# Altium PCB bootleg-alps.PcbDoc (part 2 of 3)
Units mm, origin at the board's own origin, x right, y up, seen from the top; angles counter-clockwise.
Board outline 284.8 x 94.3 mm, 2 copper layers (Component Side, Bottom Layer), stack 1.571 mm thick; 188 components, 146 nets, 677 pads, 266 vias.
Unrouted connection lines stored in the file: 68.
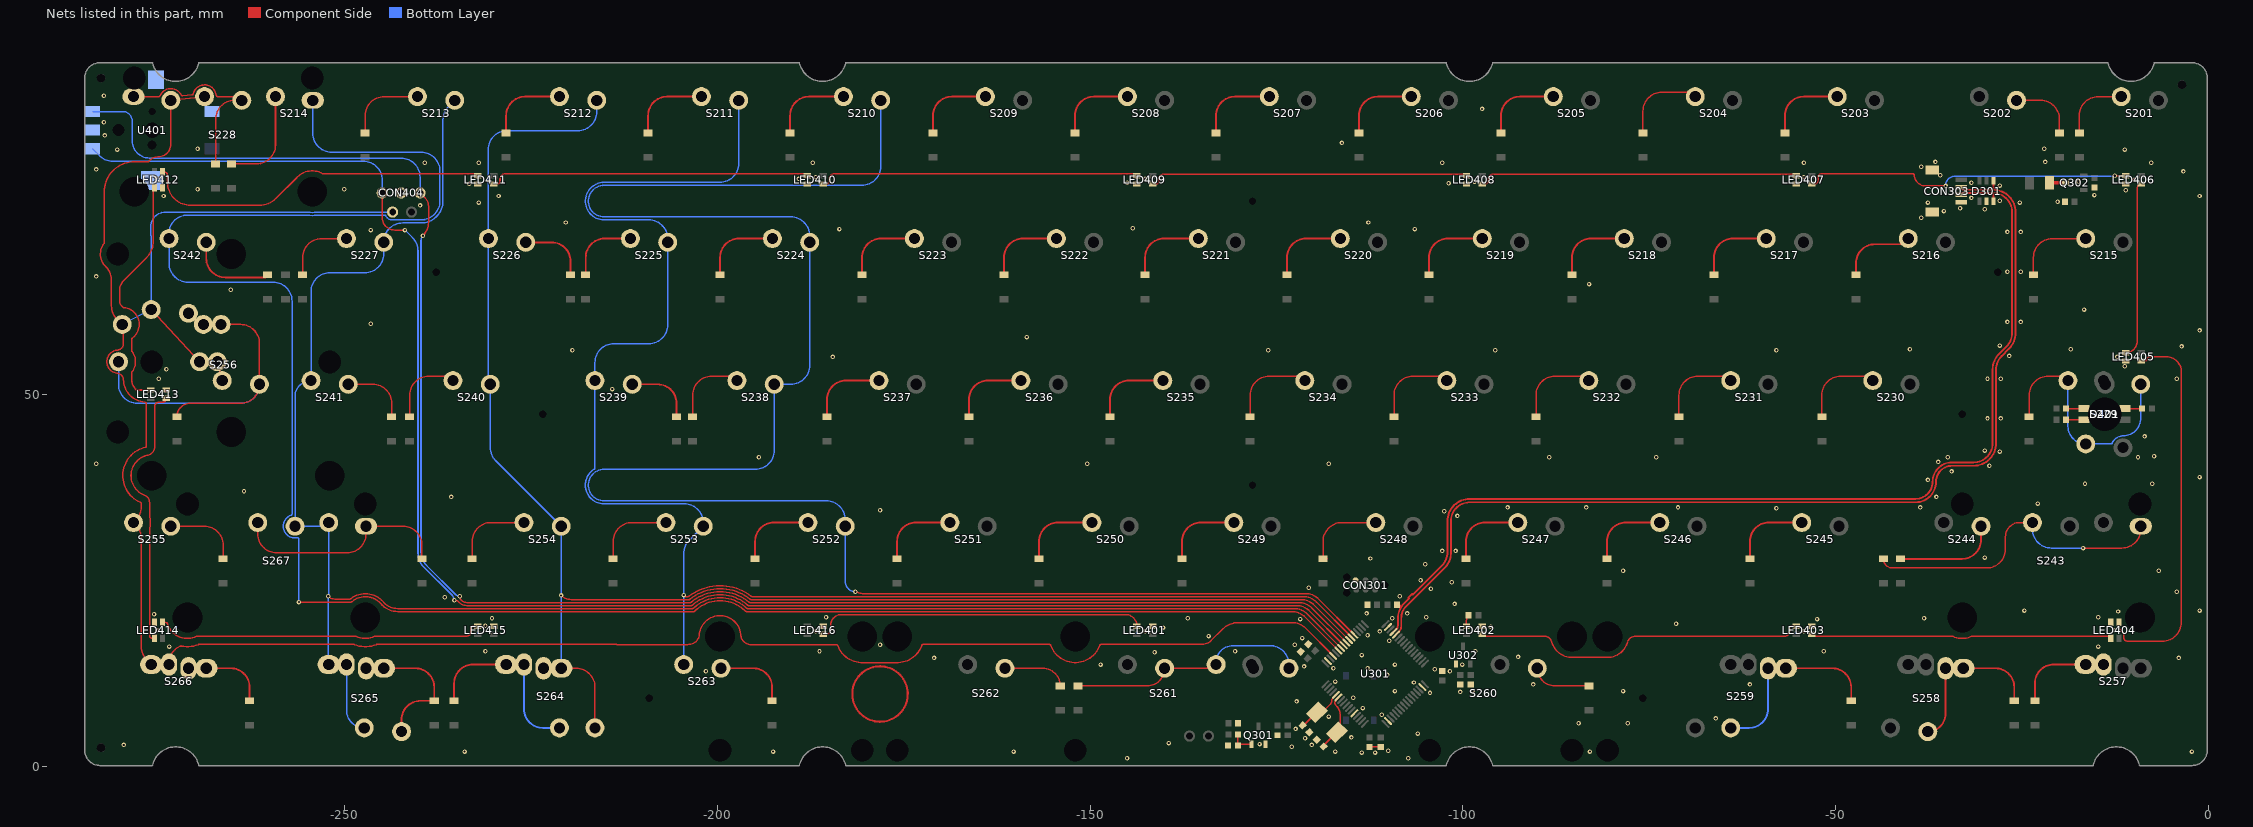
[diagram p2: the nets of this part, all layers, seen from the top]

## Via types
v1: diameter 0.6, hole 0.3, Component Side to Bottom Layer, tented both sides, 264 vias
v2: diameter 1, hole 0.5, Component Side to Bottom Layer, tented both sides, 2 vias

## Nets (pads, with @x,y where several pads share a name; then routed paths per layer and width w, separated by ;. In a path a pad name is that pad's centre, name@x,y a point inside that pad or via, vN(x,y) a via of type N, cw(c..) or ccw(c..) an arc to the next point about the centre after c; other vN are vias at no path point) (continued)
col10: S210.2 S224.2 S238.2 S252.2 U301.53 | length 259.9
  Component Side w0.203: v1@-181.483,23.622 ccw(c-180.563,24.542) -180.563,23.241 -121.132,23.241 cw(c-121.132,20.701) -119.336,22.497 U301.53@-114.553,17.714
  Bottom Layer w0.203: v1(-181.483,23.495) cw(c-181.483,24.874) -182.862,24.874 S252.2@-182.862,32.265 -182.862,33.137 ccw(c-185.402,33.137) -185.402,35.677 -215.212,35.677 cw(c-215.212,37.79) -215.212,39.903 -194.927,39.903 ccw(c-194.927,42.443) -192.387,42.443 S238.2@-192.387,51.315 -190.165,51.315 ccw(c-190.165,53.855) -187.625,53.855 S224.2@-187.625,70.365 -187.625,71.237 ccw(c-190.165,71.237) -190.165,73.777 -215.212,73.777 cw(c-215.212,75.89) -215.212,78.003 -180.64,78.003 ccw(c-180.64,80.543) -178.1,80.543 S210.2@-178.1,89.415
col11: S211.2 S225.2 S239.2 S253.2 S263.2 U301.54 | length 221.8
  Component Side w0.203: v1(-204.531,23.038) -204.331,22.838 -203.939,22.838 ccw(c-203.939,23.041) -203.815,22.88 cw(c-199.649,17.47) -201.939,23.902 cw(c-199.649,17.47) -197.039,23.779 cw(c-199.649,17.47) -195.484,22.88 ccw(c-195.36,23.041) -195.36,22.838 -121.436,22.838 cw(c-121.436,20.298) -119.64,22.094 U301.54@-114.907,17.36
  Bottom Layer w0.203: -217.502,36.748 cw(c-215.212,37.79) -216.549,39.922 ccw(c-215.212,37.79) -215.212,35.274 -204.452,35.274 cw(c-204.452,32.734) -201.912,32.734 S253.2@-201.912,32.265 -203.787,30.39 ccw(c-201.991,28.594) -204.531,28.594 S263.2@-204.531,13.715 ; -216.548,39.922 cw(c-215.212,37.79) -216.534,39.931 ccw(c-216.641,40.104) -216.437,40.105 S239.2@-216.437,51.815 -216.437,54.229 cw(c-213.897,54.229) -213.897,56.769 -209.215,56.769 ccw(c-209.215,59.309) -206.675,59.309 S225.2@-206.675,70.365 -206.675,70.834 ccw(c-209.215,70.834) -209.215,73.374 -215.212,73.374 cw(c-215.212,75.89) -215.212,78.406 -199.69,78.406 ccw(c-199.69,80.946) -197.15,80.946 S211.2@-197.15,89.415
col12: S212.2 S226.2 S240.2 S254.2 S264.1 U301.55 | length 212.6
  Component Side w0.203: v1(-220.98,22.987) ccw(c-219.647,24.32) -219.647,22.435 -217.805,22.435 -203.799,22.435 ccw(c-203.799,22.638) -203.672,22.479 cw(c-199.649,17.47) -195.627,22.479 ccw(c-195.5,22.638) -195.5,22.435 -121.74,22.435 cw(c-121.74,19.895) -119.944,21.691 U301.55@-115.26,17.007 ; S264.1@-220.962,13.215 -218.977,13.215 cw(c-218.977,10.675) -216.437,10.675 S264.1@-216.437,5.215
  Bottom Layer w0.203: S264.1@-220.962,13.215 -220.962,13.589 cw(c-220.919,13.632) -220.98,13.632 v1(-220.98,22.987) ccw(c-221.023,23.03) -220.962,23.03 S254.2@-220.962,32.265 -229.744,41.046 cw(c-227.947,42.842) -230.487,42.842 S240.2@-230.487,51.315 cw(c-229.818,51.985) -230.765,51.985 -230.765,82.804 cw(c-228.225,82.804) -228.225,85.344 -218.74,85.344 ccw(c-218.74,87.884) -216.2,87.884 S212.2@-216.2,89.415
col13: S213.2 S227.2 S241.2 S265.2 S267.1 U301.58 | length 245.7
  Component Side w0.203: v1(-252.222,22.86) ccw(c-251.356,23.726) -251.356,22.501 -250.952,22.501 -249.327,22.501 ccw(c-249.327,22.704) -249.202,22.544 cw(c-247.242,20.01) -247.242,23.214 cw(c-247.242,20.01) -245.281,22.543 ; U301.58@-116.321,15.946 -120.856,20.481 ccw(c-122.652,18.685) -122.652,21.225 -195.707,21.225 -195.95,21.225 cw(c-195.95,21.428) -196.089,21.28 ccw(c-199.649,17.47) -203.21,21.28 cw(c-203.349,21.428) -203.349,21.225 -242.91,21.225 cw(c-242.91,23.765) -244.707,21.969 ; -244.715,21.979 ccw(c-244.555,22.104) -244.707,21.969 ; -244.715,21.979 ccw(c-247.242,20.01) -245.28,22.543 cw(c-247.242,20.01) -244.715,21.979 ; -244.715,21.979 ccw(c-244.555,22.104) -244.714,21.978 ccw(c-244.555,22.104) -244.707,21.969
  Bottom Layer w0.203: S265.2@-252.19,14.295 -252.195,14.3 -252.195,22.833 v1(-252.222,22.86) ccw(c-252.222,22.927) -252.155,22.927 S267.1@-252.155,32.765 cw(c-252.655,32.765) -252.655,32.265 S267.1@-256.68,32.265 -256.68,49.667 cw(c-254.532,49.667) S241.2@-254.532,51.815 -254.532,63.754 cw(c-251.992,63.754) -251.992,66.294 -247.315,66.294 ccw(c-247.315,68.834) -244.775,68.834 S227.2@-244.775,70.365 -244.775,70.427 cw(c-242.235,70.427) -242.235,72.967 -239.776,72.967 ccw(c-239.776,75.91) -237.604,73.924 ccw(c-239.776,75.91) -236.833,75.91 -236.833,86.78 cw(c-234.293,86.78) -236.089,88.576 S213.2@-235.25,89.415 S213.2@-235.331,89.415 ; S265.2@-249.769,13.715 -249.769,7.596 ccw(c-247.388,7.596) S265.2@-247.388,5.215
col14: S214.2 S242.2 U301.59 | length 277.5
  Component Side w0.203: v1(-256.159,22.098) -249.184,22.098 ccw(c-249.184,22.301) -249.053,22.146 cw(c-247.242,20.01) -245.431,22.146 ; -246.81,22.777 cw(c-247.242,20.01) -245.431,22.146 ; U301.59@-116.674,15.593 -121.16,20.078 ccw(c-122.956,18.282) -122.956,20.822 -196.113,20.822 cw(c-196.113,21.025) -196.256,20.881 ccw(c-199.649,17.47) -203.043,20.881 cw(c-203.186,21.025) -203.186,20.822 -242.911,20.822 cw(c-242.91,23.765) -244.988,21.68 cw(c-244.707,21.969) -245.01,21.703 cw(c-244.555,22.104) -245.032,21.729 ccw(c-247.242,20.01) -245.43,22.145 ccw(c-247.242,20.01) -245.431,22.146
  Bottom Layer w0.203: S242.2@-273.627,71.445 -273.627,71.479 cw(c-271.087,71.479) -271.087,74.019 -255.031,74.019 cw(c-255.03,73.816) -254.991,74.015 ccw(c-254.381,77.16) -253.771,74.015 cw(c-253.732,73.816) -253.731,74.019 -244.897,74.019 cw(c-244.897,71.805) -244.833,74.018 cw(c-244.897,71.805) -244.655,74.005 cw(c-244.678,73.804) -244.501,73.904 ccw(c-243.586,74.422) -243.586,73.37 ccw(c-243.586,74.422) -243.565,73.371 cw(c-243.561,73.167) -243.564,73.371 cw(c-243.561,73.167) -243.56,73.371 -243.333,73.371 ; S242.2@-273.587,70.865 -273.587,67.564 ccw(c-271.047,67.564) -271.047,65.024 -259.623,65.024 cw(c-259.623,62.484) -257.083,62.484 -257.083,33.934 cw(c-257.286,33.933) -257.217,33.742 ccw(c-256.68,32.265) -256.399,30.719 cw(c-256.362,30.519) -256.159,30.518 v1(-256.159,22.098) ; S214.2@-254.3,89.415 -254.3,85.007 ccw(c-251.76,85.007) -251.76,82.467 -239.776,82.467 cw(c-239.776,79.927) -237.236,79.927 -237.236,75.91 cw(c-239.776,75.91) -239.776,73.37 -243.332,73.37
col15: CON403.2 S228.1 S255.2 S256.2 S266.2 U301.61 U401.2 | length 327.6
  Component Side w0.203: -280.59,52.79 cw(c-280.361,54.345) -280.59,55.9 cw(c-280.361,54.345) -280.588,55.9 cw(c-280.361,54.345) -280.439,55.915 ccw(c-280.449,56.118) -280.409,55.918 ccw(c-280.59,56.792) -279.698,56.792 -279.698,59.181 ccw(c-279.861,59.181) S256.2@-279.861,59.345 -280.561,60.045 cw(c-278.765,61.841) -281.305,61.841 -281.305,62.304 ccw(c-281.508,62.305) -281.306,62.327 cw(c-279.061,62.575) -281.32,62.575 -281.32,65.374 ccw(c-283.672,65.374) -281.989,67.018 ccw(c-283.672,65.374) -282.009,67.037 cw(c-280.465,68.783) -282.795,68.839 cw(c-280.465,68.783) -282.305,70.214 ccw(c-282.465,70.338) -282.262,70.34 -282.262,77.097 cw(c-278.257,77.16) -281.758,79.105 cw(c-278.257,77.16) -278.578,81.152 cw(c-278.257,77.16) -278.576,81.152 cw(c-278.257,77.16) -277.944,81.153 ccw(c-277.928,81.356) -277.928,81.152 -276.447,81.152 ccw(c-276.447,81.356) -276.286,81.231 cw(c-275.082,80.299) -275.082,81.821 ccw(c-275.082,83.559) -273.344,83.559 S228.1@-273.344,89.415 S228.1@-268.819,89.915 ; -280.589,52.79 ccw(c-280.361,54.345) -280.439,52.775 cw(c-280.449,52.572) -280.406,52.771 cw(c-280.59,51.898) -280.024,52.588 cw(c-280.59,51.898) -279.698,51.898 cw(c-279.899,51.868) -279.695,51.875 ccw(c-276.606,51.99) -279.685,51.707 ; -279.406,50.678 cw(c-276.606,51.99) -279.685,51.706 ccw(c-276.606,51.99) -276.863,48.909 ; -279.283,40.987 ccw(c-275.888,39.06) -279.419,40.725 ccw(c-275.888,39.06) -279.419,40.724 ccw(c-275.888,39.06) -279.49,37.555 ccw(c-275.888,39.06) -277.426,35.472 cw(c-277.507,35.286) -277.303,35.285 -277.303,34.864 cw(c-279.843,34.864) -278.047,33.068 S255.2@-278.35,32.765 -278.047,32.462 cw(c-279.843,30.666) -277.303,30.666 -277.303,28.067 -277.303,18.161 -277.303,16.102 ccw(c-274.763,16.102) -276.559,14.306 S266.2@-275.968,13.715 ; -279.282,40.988 cw(c-275.888,39.06) -277.568,42.584 cw(c-275.888,39.06) -276.772,42.862 ccw(c-276.818,43.06) -276.615,43.061 -276.615,47.117 -276.615,47.96 -276.615,48.661 ccw(c-276.863,48.661) -276.616,48.676 ccw(c-276.818,48.664) -276.715,48.839 ; -276.862,48.909 cw(c-276.88,48.707) -276.752,48.865 ccw(c-276.564,49.1) -276.716,48.84 ; S256.2@-275.98,61.345 S256.2@-269.48,54.345 ; S256.2@-275.642,61.547 S256.2@-275.617,61.573 ; S266.2@-273.587,13.715 -273.587,13.873 cw(c-271.047,13.873) -273.552,14.295 cw(c-271.047,13.873) -272.095,16.187 cw(c-272.012,16.002) -271.968,16.2 ccw(c-271.118,20.01) -269.637,16.398 cw(c-269.56,16.21) -269.559,16.413 -248.801,16.413 cw(c-248.8,16.21) -248.723,16.398 ccw(c-247.242,20.01) -245.761,16.398 cw(c-245.684,16.21) -245.683,16.413 -213.56,16.413 cw(c-213.56,16.31) -213.487,16.383 -204.128,16.383 ccw(c-204.128,18.144) -203.811,16.412 cw(c-203.775,16.212) -203.784,16.415 ccw(c-203.848,17.828) -202.474,17.492 ccw(c-203.743,17.803) -202.453,17.595 cw(c-202.253,17.562) -202.447,17.622 -202.446,17.625 ; S256.2@-267.099,54.345 S256.2@-266.45,51.815 ; -202.368,18.144 ccw(c-199.649,17.47) -202.446,17.626 cw(c-199.649,17.47) -202.443,17.672 cw(c-199.649,17.47) -202.309,18.346 ; -202.309,18.347 cw(c-199.649,17.47) -201.59,19.489 cw(c-199.649,17.47) -197.973,19.713 ; -197.973,19.713 cw(c-199.649,17.47) -196.866,17.778 cw(c-199.649,17.47) -196.851,17.574 ccw(c-195.476,17.778) -196.835,17.487 cw(c-197.034,17.444) -196.834,17.481 ccw(c-195.549,17.717) -196.021,16.499 cw(c-196.094,16.31) -196.015,16.497 ccw(c-195.476,17.778) -195.476,16.388 -184.064,16.388 cw(c-184.063,16.185) -183.872,16.255 ccw(c-180.589,17.47) -182.531,14.557 ccw(c-180.589,17.47) -180.455,13.972 cw(c-180.447,13.769) -180.446,13.972 -176.129,13.972 ccw(c-176.129,15.431) -176.066,13.974 cw(c-176.053,13.622) -176.033,13.973 ccw(c-175.869,17.47) -173.243,15.156 ccw(c-175.869,17.47) -172.577,16.279 cw(c-172.386,16.21) -172.385,16.413 -155.477,16.413 cw(c-155.476,16.21) -155.285,16.279 ccw(c-151.993,17.47) -148.701,16.279 cw(c-148.51,16.21) -148.509,16.413 -134.99,16.413 ccw(c-134.99,18.15) -133.761,16.923 -132.202,18.482 cw(c-130.121,16.401) -130.121,19.344 -122.892,19.344 cw(c-122.892,16.804) -121.096,18.6 U301.61@-117.381,14.886
  Component Side w0.254: S255.2@-278.39,33.345 -278.313,33.345 ccw(c-278.313,33.401) S255.2@-278.257,33.401 ; S256.2@-276.02,61.925 S256.2@-275.642,61.547
  Bottom Layer w0.203: S256.2@-279.861,59.345 S256.2@-275.98,61.345 -275.98,71.207 ccw(c-276.02,71.207) -276.02,71.247 -276.02,72.468 cw(c-274.066,72.468) -275.962,72.939 cw(c-274.066,72.468) -274.066,74.422 -254.991,74.422 cw(c-254.99,74.219) -254.949,74.418 ccw(c-254.381,77.16) -253.813,74.418 cw(c-253.772,74.219) -253.771,74.422 CON403.2@-243.586,74.422
D_N: CON303.2 D301.4 U301.44 | length 139.5
  Component Side w0.254: U301.44@-108.967,17.714 -108.967,17.726 -108.555,18.138 ccw(c-109.28,18.863) -108.451,18.261 ccw(c-109.28,18.863) -108.255,18.863 -108.255,19.872 cw(c-105.818,19.872) -107.542,21.594 ; -107.541,21.595 -102.344,26.792 ccw(c-104.14,28.588) -101.6,28.588 -101.6,32.944 cw(c-99.06,32.944) -99.06,35.484 -39.243,35.484 ccw(c-39.243,38.227) -36.5,38.227 cw(c-34.341,38.227) -34.341,40.386 -31.445,40.386 ccw(c-31.445,43.383) -28.448,43.383 -28.448,53.292 cw(c-25.908,53.292) -27.704,55.088 -26.709,56.084 ccw(c-28.826,58.201) -26.707,56.085 ccw(c-28.826,58.201) -25.832,58.201 -25.832,74.422 ccw(c-28.829,74.422) -28.829,77.419 ; CON303.2@-33.125,77.75 ccw(c-32.794,77.75) -32.794,77.419 -28.829,77.419 ; D301.4@-28.768,78.625 -28.768,77.48 cw(c-28.829,77.48) -28.829,77.419
D_P: CON303.3 D301.3 R302.2 U301.45 | length 139.1
  Component Side w0.254: U301.45@-109.32,18.067 -109.308,18.067 -108.896,18.479 ccw(c-109.341,18.924) -108.712,18.924 -108.712,19.872 cw(c-105.818,19.872) -108.59,20.703 cw(c-105.818,19.872) -108.319,21.329 ; R302.2@-108.824,21.717 -108.707,21.717 cw(c-108.707,21.329) -108.319,21.329 ; CON303.3@-33.125,76.75 cw(c-32.913,76.75) -32.913,76.962 -28.829,76.962 ; D301.3@-28.768,75.875 -28.768,76.901 ccw(c-28.829,76.901) -28.829,76.962 ; -108.319,21.329 cw(c-105.818,19.872) -107.866,21.917 cw(c-105.818,19.872) -107.864,21.918 -107.373,22.41 -107.309,22.473 -107.22,22.563 -107.311,22.654 -106.772,23.193 -106.681,23.102 -103.753,26.029 -102.801,26.982 ccw(c-104.597,28.778) -102.057,28.778 -102.057,32.944 cw(c-99.06,32.944) -99.06,35.941 -39.243,35.941 ccw(c-39.243,38.227) -36.957,38.227 cw(c-34.341,38.227) -34.341,40.843 -31.445,40.843 ccw(c-31.445,43.383) -28.905,43.383 -28.905,53.294 cw(c-25.911,53.294) -28.028,55.411 -27.033,56.406 ccw(c-28.829,58.202) -26.289,58.202 -26.289,74.422 ccw(c-28.829,74.422) -28.829,76.962
ENC_A: CON404.3 U301.57 U401.A | length 224.6
  Component Side w0.203: CON404.3@-245.128,76.855 CON404.3@-244.983,77 -244.983,73.681 ccw(c-243.311,73.681) -243.311,72.009 v1(-241.935,72.009) ; v1(-235.299,22.352) cw(c-235.299,21.51) -235.012,22.302 cw(c-235.299,21.51) -234.703,22.105 ccw(c-234.072,22.737) -234.674,22.077 cw(c-234.811,21.927) -234.662,22.065 ccw(c-233.799,22.86) -234.629,22.031 ccw(c-233.799,22.86) -234.628,22.03 ccw(c-233.799,22.86) -234.627,22.029 ccw(c-233.657,23.002) -233.657,21.628 -203.505,21.628 ccw(c-203.505,21.831) -203.37,21.679 cw(c-199.649,17.47) -195.929,21.679 ccw(c-195.794,21.831) -195.794,21.628 -122.348,21.628 cw(c-122.348,19.088) -120.552,20.884 U301.57@-115.967,16.3
  Bottom Layer w0.203: U401.A@-283.844,82.915 -282.931,82.002 ccw(c-281.135,83.798) -282.147,81.468 ccw(c-281.135,83.798) -281.135,81.258 -247.523,81.258 cw(c-247.523,78.718) -244.983,78.718 CON404.3@-244.983,77 ; v1(-241.935,72.009) -240.923,70.997 cw(c-242.719,69.201) -240.179,69.201 -240.179,28.633 ccw(c-237.639,28.633) -239.435,26.837 -235.595,22.997 cw(c-236.19,22.402) -235.349,22.402 v1(-235.299,22.352)
ENC_B: CON404.1 U301.56 U401.B | length 231.5
  Component Side w0.203: CON404.1@-239.903,77 -239.236,76.333 cw(c-240.385,75.184) -238.76,75.184 -238.76,73.061 cw(c-241.3,73.061) -239.504,71.265 v1(-239.522,71.247) ; v1(-234.569,22.86) ccw(c-233.799,22.86) -234.493,22.527 ccw(c-233.799,22.86) -234.344,22.316 ccw(c-233.657,23.002) -233.657,22.031 -206.502,22.031 -203.655,22.031 ; -203.654,22.031 ccw(c-203.655,22.235) -203.524,22.079 cw(c-199.649,17.47) -195.775,22.079 ccw(c-195.644,22.235) -195.644,22.031 -122.044,22.031 cw(c-122.044,19.491) -120.248,21.287 U301.56@-115.614,16.653
  Bottom Layer w0.203: U401.B@-283.844,87.915 -279.812,87.915 cw(c-279.812,86.614) -278.511,86.614 -278.511,83.961 ccw(c-276.224,83.961) -276.224,81.674 ccw(c-275.971,84.201) -275.971,81.661 -242.443,81.661 cw(c-242.443,79.121) -239.903,79.121 CON404.1@-239.903,77 ; v1(-239.522,71.247) ccw(c-238.909,70.634) -239.685,71.021 ccw(c-238.909,70.634) -239.776,70.634 -239.776,28.8 ccw(c-237.236,28.8) -239.032,27.004 -235.113,23.085 ccw(c-234.569,23.63) -234.902,22.936 ccw(c-234.569,23.63) v1(-234.569,22.86)
GND: C301.1 C302.1 C303.1 C304.1 C305.1 C306.1 C307.1 C308.1 C310.1 C311.1 C312.1 C317.2 CON301.5 CON303.4 CON303.5 CON404.2 D301.2 LED401.3 LED402.3 LED403.3 LED404.3 LED405.3 LED406.3 LED407.3 LED408.3 LED409.3 LED410.3 LED411.3 LED412.3 LED413.3 LED414.3 LED415.3 LED416.3 Q301.2 R301.2 R304.2 R305.2 U301.12 U301.18 U301.31 U301.47 U301.63 U302.1 U401.C U401.M | length 24.9
  Component Side w0.203: C301.1@-112.522,2.652 C306.1@-110.998,2.652
  Component Side w0.279: -174.471,9.884 cw(c-178.189,9.76) -174.472,9.898
  other v1: -145.034,1.143 -107.315,1.143 -113.538,1.905 -111.76,1.905 -233.934,2.032 -192.532,2.032 -160.274,2.032 -117.094,2.032 -82.931,2.032 -2.159,2.032 -109.982,2.159 -122.936,2.667 -279.654,2.921 -120.269,2.921 -127.254,3.048 -139.446,3.175 -121.158,3.81 -114.935,3.937 -106.045,4.445 -122.428,5.08 -84.455,5.842 -77.851,5.842 -66.04,6.477 -117.983,6.731 -110.871,6.985 -113.411,7.874 -122.301,8.763 -114.681,9.271 -104.394,9.906 -100.33,10.033 -109.093,10.16 -98.679,10.16 -78.486,10.16 -90.551,11.049 -61.468,11.049 -106.553,11.303 -117.094,11.43 -110.109,12.319 -201.549,12.827 -101.727,12.827 -103.759,13.081 -117.348,13.208 -112.776,13.208 -121.285,13.462 -148.59,13.716 -109.093,13.716 -100.076,13.716 -170.942,14.605 -3.937,14.605 -92.583,14.732 -113.538,14.986 -141.351,15.367 -231.14,15.494 -186.309,15.494 -130.556,15.494 -98.298,15.494 -51.562,15.494 -273.558,16.129 -14.732,16.129 -178.181,16.383 -122.555,16.383 -109.855,16.891 -121.539,17.272 -134.112,17.526 -112.776,17.653 -186.817,18.161 -142.621,18.161 -111.125,18.161 -54.229,18.161 -275.082,18.288 -12.573,18.288 -140.208,18.669 -96.266,18.796 -231.14,18.923 -71.374,19.177 -121.793,19.812 -52.451,19.812 -230.251,19.939 -136.906,19.939 -109.474,19.939 -38.1,19.939 -185.42,20.066 -104.902,20.066 -14.732,20.066 -275.59,20.447 -112.903,20.574 -107.442,20.574 -12.065,20.828 -24.638,20.955 -1.143,20.955 -101.092,21.844 -236.601,22.733 -108.458,22.86 -4.191,23.495 -104.267,23.876 -120.65,24.003 -101.473,24.765 -105.664,25.019 -78.486,26.289 -6.604,26.289 -105.029,27.178 -112.395,27.94 -29.972,28.067 -102.743,28.956 -100.965,28.956 -100.711,33.655 -102.489,34.29 -178.181,34.417 -57.912,34.671 -93.98,34.798 -83.439,34.798 -71.12,34.798 -38.608,34.798 -22.86,35.306 -235.712,36.195 -36.449,36.195 -263.525,36.957 -16.51,37.973 -7.493,37.973 -37.592,38.481 -1.143,38.862 -34.417,39.624 -29.337,40.386 -283.337,40.64 -150.368,40.64 -117.983,40.64 -36.195,40.894 -194.437,41.529 -88.392,41.529 -74.041,41.529 -34.925,41.529 -9.398,41.529 -7.239,41.656 -27.94,42.291 -29.972,42.418 -8.509,44.323 -29.591,46.736 -27.813,46.736 -214.122,50.673 -274.955,52.07 -29.591,52.07 -27.813,52.07 -4.191,52.07 -273.939,53.34 -11.176,53.721 -184.531,54.991 -12.192,54.991 -26.67,55.118 -219.456,55.88 -126.111,55.88 -95.631,55.88 -57.912,55.88 -40.005,56.007 -18.415,56.007 -3.556,56.388 -27.94,56.515 -158.496,57.658 -1.143,58.547 -246.507,59.436 -26.924,59.69 -25.146,59.69 -16.637,61.341 -265.303,64.008 -83.058,64.77 -283.337,65.786 -26.924,66.421 -25.146,66.421 -26.924,71.755 -25.146,71.755 -246.507,72.009 -183.642,72.136 -106.426,72.136 -144.272,72.263 -220.345,73.025 -112.649,73.025 -38.481,73.66 -35.433,74.549 -29.972,74.803 -33.274,74.93 -239.903,75.311 -232.029,75.692 -37.592,75.692 -25.273,75.692 -20.193,75.819 -27.94,75.946 -31.75,76.327 -274.32,76.581 -229.362,76.581 -1.143,76.581 -15.24,76.708 -11.049,77.343 -269.748,77.47 -250.063,77.47 -34.417,77.47 -27.94,77.978 -233.299,78.232 -101.908,78.302 -145.034,78.359 -31.75,78.359 -98.425,78.486 -17.399,78.486 -9.906,78.74 -189.103,78.867 -142.621,78.867 -186.817,79.121 -54.229,79.121 -35.941,79.375 -3.302,79.883 -283.337,80.137 -38.481,80.518 -239.268,81.026 -232.029,81.026 -187.198,81.026 -102.743,81.026 -54.229,81.026 -7.62,81.026 -36.576,81.153 -21.844,81.153 -280.543,82.804 -11.176,82.804 -269.748,82.931 -21.971,82.931 -116.205,83.693 -282.194,84.709 -282.321,86.487 -97.409,88.265 -282.321,90.043
NetC307_2: C307.2 U301.5 X301.1 | length 6.3
  Component Side w0.203: C307.2@-121.491,5.54 ccw(c-121.491,5.871) -121.256,5.637 X301.1@-119.581,7.313 ; X301.1@-119.127,6.786 -119.127,6.911 cw(c-118.825,6.911) X301.1@-119.039,7.123 ; X301.1@-119.038,7.124 -118.898,7.265 -117.745,8.417 ccw(c-118.092,8.763) -117.602,8.763 cw(c-116.839,8.763) -117.379,9.302 U301.5@-117.028,9.653
NetC308_2: C308.2 U301.6 X301.2 | length 7.8
  Component Side w0.203: C308.2@-118.666,2.715 cw(c-118.335,2.715) -118.569,2.95 X301.2@-116.893,4.625 ccw(c-118.035,5.767) -116.421,5.767 -116.421,6.809 ccw(c-118.407,6.809) -117.003,8.213 cw(c-116.71,8.557) -117.029,8.876 -116.733,9.172 ccw(c-116.877,9.316) U301.6@-116.674,9.299
NetC309_2: C309.2 Q301.1 R305.1 | length 3.4
  Component Side w0.203: C309.2@-130.16,4.318 -130.16,2.881 cw(c-130.211,2.881) R305.1@-130.175,2.845 cw(c-129.699,2.369) -129.699,3.042 Q301.1@-128.346,3.042
NetD201_1: D201.1 S201.1 | length 9.4
  Component Side w0.203: D201.1@-17.272,85.05 -17.272,87.375 cw(c-14.732,87.375) -14.732,89.915 S201.1@-11.65,89.915
NetD202_1: D202.1 S202.1 | length 9
  Component Side w0.203: S202.1@-25.7,89.415 -22.479,89.415 cw(c-22.479,86.875) -19.939,86.875 D202.1@-19.939,85.05
NetD203_1: D203.1 S203.1 | length 10.8
  Component Side w0.254: D203.1@-56.769,85.05 -56.769,87.375 cw(c-54.229,87.375) -54.229,89.915 S203.1@-49.75,89.915
NetD204_1: D204.1 S204.1 | length 11.3
  Component Side w0.203: D204.1@-75.819,85.05 -75.819,87.955 cw(c-73.279,87.955) -73.279,90.495 S204.1@-68.84,90.495
NetD205_1: D205.1 S205.1 | length 10.8
  Component Side w0.254: D205.1@-94.869,85.05 -94.869,87.375 cw(c-92.329,87.375) -92.329,89.915 S205.1@-87.85,89.915
NetD206_1: D206.1 S206.1 | length 10.8
  Component Side w0.254: D206.1@-113.919,85.05 -113.919,87.375 cw(c-111.379,87.375) -111.379,89.915 S206.1@-106.9,89.915
NetD207_1: D207.1 S207.1 | length 10.9
  Component Side w0.254: D207.1@-133.096,85.05 -133.096,87.375 cw(c-130.556,87.375) -130.556,89.915 S207.1@-125.95,89.915
NetD208_1: D208.1 S208.1 | length 10.8
  Component Side w0.254: D208.1@-152.019,85.05 -152.019,87.375 cw(c-149.479,87.375) -149.479,89.915 S208.1@-145,89.915
NetD209_1: D209.1 S209.1 | length 10.8
  Component Side w0.254: D209.1@-171.069,85.05 -171.069,87.375 cw(c-168.529,87.375) -168.529,89.915 S209.1@-164.05,89.915
NetD210_1: D210.1 S210.1 | length 10.9
  Component Side w0.254: D210.1@-190.246,85.05 -190.246,87.375 cw(c-187.706,87.375) -187.706,89.915 S210.1@-183.1,89.915
NetD211_1: D211.1 S211.1 | length 10.9
  Component Side w0.254: D211.1@-209.296,85.05 -209.296,87.375 cw(c-206.756,87.375) -206.756,89.915 S211.1@-202.15,89.915
NetD212_1: D212.1 S212.1 | length 10.9
  Component Side w0.254: D212.1@-228.346,85.05 -228.346,87.375 cw(c-225.806,87.375) -225.806,89.915 S212.1@-221.2,89.915
NetD213_1: D213.1 S213.1 | length 10.8
  Component Side w0.203: D213.1@-247.269,85.05 -247.269,87.375 cw(c-244.729,87.375) -244.729,89.915 S213.1@-240.25,89.915
NetD214_1: D214.1 S214.1 | length 13.8
  Component Side w0.203: D214.1@-265.176,80.885 -261.84,80.885 ccw(c-261.84,83.425) -259.3,83.425 S214.1@-259.3,89.915
NetD215_1: D215.1 S215.2 | length 10.8
  Component Side w0.203: D215.1@-23.431,66 -23.431,68.325 cw(c-20.892,68.325) -20.892,70.865 S215.2@-16.412,70.865
NetD216_1: D216.1 S216.1 | length 10.7
  Component Side w0.254: D216.1@-47.244,66 -47.244,67.564 cw(c-44.704,67.564) -44.704,70.104 -40.513,70.104 -40.513,70.577 cw(c-40.225,70.577) S216.1@-40.225,70.865
NetD217_1: D217.1 S217.1 | length 10.8
  Component Side w0.254: D217.1@-66.294,66 -66.294,68.325 cw(c-63.754,68.325) -63.754,70.865 S217.1@-59.275,70.865
NetD218_1: D218.1 S218.1 | length 10.8
  Component Side w0.254: D218.1@-85.344,66 -85.344,68.325 cw(c-82.804,68.325) -82.804,70.865 S218.1@-78.325,70.865
NetD219_1: D219.1 S219.1 | length 10.9
  Component Side w0.254: D219.1@-104.521,66 -104.521,68.325 cw(c-101.981,68.325) -101.981,70.865 S219.1@-97.375,70.865
NetD220_1: D220.1 S220.1 | length 10.9
  Component Side w0.254: D220.1@-123.571,66 -123.571,68.325 cw(c-121.031,68.325) -121.031,70.865 S220.1@-116.425,70.865
NetD221_1: D221.1 S221.1 | length 10.9
  Component Side w0.254: D221.1@-142.621,66 -142.621,68.325 cw(c-140.081,68.325) -140.081,70.865 S221.1@-135.475,70.865
NetD222_1: D222.1 S222.1 | length 10.8
  Component Side w0.254: D222.1@-161.544,66 -161.544,68.325 cw(c-159.004,68.325) -159.004,70.865 S222.1@-154.525,70.865
NetD223_1: D223.1 S223.1 | length 10.8
  Component Side w0.254: D223.1@-180.594,66 -180.594,68.325 cw(c-178.054,68.325) -178.054,70.865 S223.1@-173.575,70.865
NetD224_1: D224.1 S224.1 | length 10.8
  Component Side w0.254: D224.1@-199.644,66 -199.644,68.325 cw(c-197.104,68.325) -197.104,70.865 S224.1@-192.625,70.865
NetD225_1: D225.1 S225.1 | length 9.8
  Component Side w0.254: D225.1@-217.678,66 -217.678,68.325 cw(c-215.138,68.325) -215.138,70.865 S225.1@-211.675,70.865
NetD226_1: D226.1 S226.1 | length 9.3
  Component Side w0.254: S226.1@-225.725,70.365 -222.25,70.365 cw(c-222.25,67.825) -219.71,67.825 D226.1@-219.71,66
NetD227_1: D227.1 S227.1 | length 9.7
  Component Side w0.203: D227.1@-255.651,66 -255.651,68.325 cw(c-253.111,68.325) -253.111,70.865 S227.1@-249.775,70.865
NetD228_1: D228.1 S228.2 | length 27.9
  Component Side w0.203: S228.2@-278.344,89.915 -274.974,89.915 ccw(c-274.974,90.118) -274.787,90.038 cw(c-273.344,89.415) -271.934,90.11 ccw(c-271.753,90.201) -271.73,89.999 -270.521,90.133 ccw(c-270.544,90.335) -270.346,90.287 cw(c-268.819,89.915) -267.258,90.094 ccw(c-267.056,90.118) -267.056,89.915 -265.026,89.915 cw(c-265.026,88.208) S228.2@-263.819,89.415 -264.795,89.415 ccw(c-264.795,86.875) -267.335,86.875 D228.1@-267.335,80.885
NetD229_1: D229.1 S229.1 | length 33.7
  Component Side w0.203: D229.1@-24.003,46.95 -24.003,49.855 cw(c-21.463,49.855) -21.463,52.395 -18.834,52.395 -18.834,52.308 cw(c-20.447,52.308) S229.1@-18.907,51.826
  Bottom Layer w0.203: S229.1@-18.794,51.815 -18.794,45.696 ccw(c-16.412,45.696) S229.1@-16.412,43.315 -13.042,43.315 ccw(c-13.042,43.518) -12.855,43.438 cw(c-11.412,42.815) -12.065,44.245 cw(c-11.412,42.815) -11.409,44.387 ; -11.431,44.386 cw(c-11.412,42.815) -11.409,44.387 ; S229.1@-9.031,51.315 -9.031,46.786 cw(c-11.431,46.786) -9.204,45.891 cw(c-11.431,46.786) -9.951,44.897 cw(c-11.431,46.786) -11.409,44.387
NetD230_1: D230.1 S230.1 | length 11.1
  Component Side w0.203: D230.1@-51.816,46.95 -51.816,49.855 cw(c-49.276,49.855) -49.276,52.395 S230.1@-45.027,52.395
NetD231_1: D231.1 S231.1 | length 11.3
  Component Side w0.203: D231.1@-70.993,46.95 -70.993,49.855 cw(c-68.453,49.855) -68.453,52.395 S231.1@-64.077,52.395
NetD232_1: D232.1 S232.1 | length 11.4
  Component Side w0.203: D232.1@-90.17,46.95 -90.17,49.855 cw(c-87.63,49.855) -87.63,52.395 S232.1@-83.127,52.395
NetD233_1: D233.1 S233.1 | length 11.4
  Component Side w0.203: D233.1@-109.22,46.95 -109.22,49.855 cw(c-106.68,49.855) -106.68,52.395 S233.1@-102.177,52.395
NetD234_1: D234.1 S234.1 | length 12.5
  Component Side w0.203: D234.1@-128.524,46.95 -128.524,49.855 cw(c-125.984,49.855) -125.984,52.395 S234.1@-121.227,52.395
  Bottom Layer w0.254: S234.1@-121.793,51.83 S234.1@-121.227,52.395
NetD235_1: D235.1 S235.1 | length 10.9
  Component Side w0.254: D235.1@-147.32,46.95 -147.32,49.275 cw(c-144.78,49.275) -144.78,51.815 S235.1@-140.237,51.815
NetD236_1: D236.1 S236.1 | length 10.7
  Component Side w0.254: D236.1@-166.243,46.95 -166.243,49.275 cw(c-163.703,49.275) -163.703,51.815 S236.1@-159.287,51.815
NetD237_1: D237.1 S237.1 | length 10.7
  Component Side w0.254: D237.1@-185.293,46.95 -185.293,49.275 cw(c-182.753,49.275) -182.753,51.815 S237.1@-178.337,51.815
NetD238_1: D238.1 S238.1 | length 10.3
  Component Side w0.203: D238.1@-203.327,46.95 -203.327,49.855 cw(c-200.787,49.855) -200.787,52.395 S238.1@-197.427,52.395
NetD239_1: D239.1 S239.1 | length 9.2
  Component Side w0.254: S239.1@-211.437,51.315 -208.026,51.315 cw(c-208.026,48.775) -205.486,48.775 D239.1@-205.486,46.95
NetD240_1: D240.1 S240.1 | length 10.1
  Component Side w0.203: D240.1@-241.3,46.95 -241.3,49.855 cw(c-238.76,49.855) -238.76,52.395 S240.1@-235.527,52.395
NetD241_1: D241.1 S241.1 | length 9.1
  Component Side w0.203: S241.1@-249.531,51.315 -246.253,51.315 cw(c-246.253,48.775) -243.713,48.775 D241.1@-243.713,46.95
NetD242_1: D242.1 S242.1 | length 12
  Component Side w0.254: S242.1@-268.587,70.365 -268.587,68.199 ccw(c-266.047,68.199) -266.047,65.659 -260.691,65.659 ccw(c-260.691,66) D242.1@-260.35,66
NetD243_1: D243.1 S243.1 | length 43.6
  Component Side w0.203: D243.1@-43.561,27.9 ccw(c-42.331,27.9) -42.331,26.67 -29.718,26.67 ccw(c-29.718,29.21) -27.179,29.142 ccw(c-29.718,29.21) -27.178,29.21 -27.178,30.861 cw(c-25.274,30.861) -25.274,32.765 S243.1@-23.556,32.765 ; v1(-16.764,29.337) -11.571,29.337 ccw(c-11.571,31.877) -9.031,31.877 S243.1@-9.031,32.265
  Bottom Layer w0.203: S243.1@-23.556,32.765 -23.556,31.877 ccw(c-21.016,31.877) -21.016,29.337 v1(-16.764,29.337)
NetD244_1: D244.1 S244.1 | length 14.1
  Component Side w0.254: D244.1@-41.275,27.9 -33,27.9 ccw(c-33,30.44) -30.46,30.44 S244.1@-30.46,32.265
NetD245_1: D245.1 S245.1 | length 10.7
  Component Side w0.254: D245.1@-61.468,27.9 -61.468,30.225 cw(c-58.928,30.225) -58.928,32.765 S245.1@-54.512,32.765
NetD246_1: D246.1 S246.1 | length 10.9
  Component Side w0.254: D246.1@-80.645,27.9 -80.645,30.225 cw(c-78.105,30.225) -78.105,32.765 S246.1@-73.562,32.765
NetD247_1: D247.1 S247.1 | length 10.7
  Component Side w0.254: D247.1@-99.568,27.9 -99.568,30.225 cw(c-97.028,30.225) -97.028,32.765 S247.1@-92.612,32.765
NetD248_1: D248.1 S248.1 | length 11.4
  Component Side w0.203: D248.1@-118.194,27.9 D248.1@-118.745,27.9 -118.745,30.225 cw(c-116.205,30.225) -116.205,32.765 S248.1@-111.662,32.765
NetD249_1: D249.1 S249.1 | length 10.7
  Component Side w0.254: D249.1@-137.668,27.9 -137.668,30.225 cw(c-135.128,30.225) -135.128,32.765 S249.1@-130.712,32.765
NetD250_1: D250.1 S250.1 | length 10.9
  Component Side w0.254: D250.1@-156.845,27.9 -156.845,30.225 cw(c-154.305,30.225) -154.305,32.765 S250.1@-149.762,32.765
NetD251_1: D251.1 S251.1 | length 10.9
  Component Side w0.254: D251.1@-175.895,27.9 -175.895,30.225 cw(c-173.355,30.225) -173.355,32.765 S251.1@-168.812,32.765
NetD252_1: D252.1 S252.1 | length 10.9
  Component Side w0.203: D252.1@-194.945,27.9 D252.1@-194.945,28.194
  Component Side w0.254: D252.1@-194.945,28.194 -194.945,30.225 cw(c-192.405,30.225) -192.405,32.765 S252.1@-187.862,32.765
NetD253_1: D253.1 S253.1 | length 10.9
  Component Side w0.203: D253.1@-213.995,27.9 -213.995,30.225 cw(c-211.455,30.225) -211.455,32.765 S253.1@-206.912,32.765
NetD254_1: D254.1 S254.1 | length 10.7
  Component Side w0.203: D254.1@-232.918,27.9 -232.918,30.225 cw(c-230.378,30.225) -230.378,32.765 S254.1@-225.962,32.765
NetD255_1: D255.1 S255.1 | length 10.3
  Component Side w0.203: S255.1@-273.35,32.265 -268.859,32.265 cw(c-268.859,29.725) -266.319,29.725 D255.1@-266.319,27.9
NetD256_1: D256.1 S256.1 | length 50.5
  Component Side w0.203: D256.1@-272.542,46.95 cw(c-270.724,46.95) -270.724,48.768 -263.99,48.768 ccw(c-263.99,51.308) -261.45,51.308 S256.1@-261.45,51.315 -261.45,56.805 ccw(c-263.99,56.805) -263.99,59.345 S256.1@-266.599,59.345
  Bottom Layer w0.203: S256.1@-280.361,54.345 -280.361,51.308 ccw(c-277.821,51.308) -277.821,48.768 -263.99,48.768 ccw(c-263.99,51.308) -261.45,51.308 S256.1@-261.45,51.315
NetD257_1: D257.1 S257.2 | length 10.6
  Component Side w0.254: D257.1@-23.241,8.85 -23.241,11.175 cw(c-20.701,11.175) -20.701,13.715 S257.2@-16.412,13.715
NetD258_1: D258.1 S258.1 | length 20
  Component Side w0.254: S258.1@-37.6,4.715 ccw(c-37.6,7.096) -35.219,7.096 S258.1@-35.219,13.215 ; S258.1@-32.838,13.215 -28.54,13.215 cw(c-28.54,10.675) -26,10.675 D258.1@-26,8.85
NetD259_1: D259.1 S259.1 | length 24
  Component Side w0.254: S259.1@-56.656,13.215 -50.419,13.215 cw(c-50.419,10.675) -47.879,10.675 D259.1@-47.879,8.85
  Bottom Layer w0.254: S259.1@-64.037,5.215 -61.577,5.215 ccw(c-61.577,7.755) -59.037,7.755 S259.1@-59.037,13.215
NetD260_1: D260.1 S260.1 | length 8.5
  Component Side w0.203: S260.1@-89.993,13.215 ccw(c-87.628,13.215) -87.628,10.85 D260.1@-83.058,10.85 D260.1@-83.219,11.011
NetD261_1: D261.1 S261.1 | length 33.7
  Component Side w0.203: D261.1@-151.638,10.85 -142.364,10.85 ccw(c-142.364,13.215) S261.1@-139.999,13.215 -133.593,13.215 ccw(c-133.593,13.715) S261.1@-133.093,13.715 S261.1@-133.093,13.462
  Bottom Layer w0.203: S261.1@-133.093,13.715 -133.093,13.973 cw(c-130.81,13.973) -130.81,16.256 -125.863,16.256 cw(c-125.863,13.716) -123.323,13.716 S261.1@-123.323,13.215
NetD262_1: D262.1 S262.1 | length 9
  Component Side w0.203: S262.1@-161.431,13.215 -156.365,13.215 cw(c-156.365,10.85) D262.1@-154,10.85 D262.1@-154.161,11.011
NetD263_1: D263.1 S263.1 | length 10
  Component Side w0.254: S263.1@-199.531,13.215 -195.199,13.215 cw(c-195.199,10.675) -192.659,10.675 D263.1@-192.659,9.033
NetD264_1: D264.1 S264.2 | length 22.9
  Component Side w0.254: D264.1@-235.331,8.85 -235.331,11.175 cw(c-232.791,11.175) -232.791,13.715 S264.2@-228.343,13.715
  Bottom Layer w0.254: S264.2@-225.962,13.715 -225.962,7.755 ccw(c-223.422,7.755) -223.422,5.215 S264.2@-221.199,5.215
NetD265_1: D265.1 S265.1 | length 17.5
  Component Side w0.254: S265.1@-244.769,13.215 -240.54,13.215 cw(c-240.54,10.675) -238,10.675 D265.1@-238,8.85 -239.848,8.85 ccw(c-239.848,6.31) -242.388,6.31 S265.1@-242.388,4.715
NetD266_1: D266.1 S266.1 | length 9.1
  Component Side w0.254: S266.1@-268.587,13.215 -265.303,13.215 cw(c-265.303,10.675) -262.763,10.675 D266.1@-262.763,8.85
NetD267_1: D267.1 S267.2 | length 30.8
  Component Side w0.203: S267.2@-261.68,32.765 -261.68,31.242 ccw(c-259.14,31.242) -259.14,28.702 -249.695,28.702 ccw(c-249.695,31.242) -247.155,31.242 S267.2@-247.155,32.265 -242.189,32.265 cw(c-242.189,29.725) -239.649,29.725 D267.1@-239.649,27.9
NetD401_1: D401.1 R402.1 | length 2.3
  Component Side w0.203: D401.1@-11.125,48.065 R402.1@-8.836,48.065
NetD401_2: D401.2 R403.1 | length 2.4
  Component Side w0.203: R403.1@-19.035,48.065 D401.2@-16.625,48.065
NetD401_3: D401.3 R401.2 | length 2.4
  Component Side w0.203: R401.2@-19.035,46.565 D401.3@-16.625,46.565
NetF301_1: F301.1 Q302.3 | length 2.1
  Component Side w0.5: F301.1@-21.256,78.359 Q302.3@-19.107,78.359
NetLED401_4: LED401.4 LED416.2 | length 44.7
  Component Side w0.203: LED416.2@-185.802,17.765 -185.435,17.765 ccw(c-185.435,18.415) -184.785,18.415 -184.785,19.023 cw(c-183.389,19.023) -183.391,20.419 cw(c-183.389,19.023) -183.389,20.419 -145.266,20.419 cw(c-145.266,18.867) LED401.4@-143.713,18.867
NetLED402_2: LED402.2 LED403.4 | length 46.2
  Component Side w0.203: LED402.2@-97.368,17.765 ccw(c-97.002,17.765) -97.354,17.665 ccw(c-97.158,17.72) -97.158,17.517 -89.078,17.517 cw(c-89.078,16.42) -88.83,17.488 -88.828,17.488 cw(c-89.068,16.464) -88.053,16.74 ccw(c-85.349,17.47) -87.035,15.233 ccw(c-85.349,17.47) -85.502,14.674 ccw(c-85.349,17.47) -85.202,14.673 cw(c-85.192,14.471) -85.191,14.674 -80.746,14.674 cw(c-80.747,14.471) -80.737,14.673 ccw(c-80.59,17.47) -80.088,14.715 ccw(c-80.59,17.47) -77.892,16.719 ; -78.029,16.335 ccw(c-80.59,17.47) -77.893,16.714 cw(c-76.88,16.433) -77.892,16.719 ; LED403.4@-55.282,18.865 -55.797,18.865 ccw(c-55.797,18.528) -56.134,18.528 -56.134,18.191 cw(c-56.808,18.191) -56.808,17.517 -57.023,17.517 -75.946,17.517 -76.781,17.517 ccw(c-76.781,16.296) -77.49,17.29 ccw(c-76.88,16.433) -77.892,16.719
NetLED402_4: LED402.4 R306.1 | length 1.5
  Component Side w0.203: LED402.4@-99.498,18.865 -99.498,19.605 cw(c-98.487,19.605) R306.1@-99.202,20.32
NetLED403_2: LED403.2 LED404.4 | length 40.8
  Component Side w0.203: LED403.2@-53.152,17.765 ccw(c-52.532,17.765) -53.148,17.699 ccw(c-52.946,17.72) -52.946,17.517 -34.318,17.517 cw(c-34.317,17.313) -34.229,17.496 ; -34.228,17.496 ccw(c-32.994,20.01) -33.017,17.21 ccw(c-32.994,20.01) -31.901,17.432 cw(c-31.487,16.465) -31.485,17.517 -13.317,17.517 cw(c-13.317,17.25) LED404.4@-13.05,17.25 LED404.4@-13.05,17.517
NetLED404_2: LED404.2 LED405.4 | length 52.1
  Component Side w0.203: LED404.2@-11.95,19.38 -11.95,18.987 ccw(c-10.838,18.987) -11.625,18.201 ; -11.624,18.201 -11.455,18.032 cw(c-11.834,17.653) -11.429,18.004 ccw(c-11.275,18.137) -11.406,17.981 cw(c-11.6,17.75) -11.387,17.964 cw(c-11.6,17.75) -11.386,17.963 cw(c-11.6,17.75) -11.298,17.75 -11.298,17.301 ccw(c-10.849,17.301) -10.849,16.852 -6.124,16.852 ccw(c-6.124,19.392) -3.584,19.392 -3.584,53.01 ccw(c-5.573,53.01) -3.851,54.005 ccw(c-5.573,53.01) -5.573,54.998 -7.936,54.998 ccw(c-7.937,54.795) -8.128,54.864 cw(c-8.542,54.864) -8.542,54.45 LED405.4@-8.935,54.45
NetLED405_2: LED405.2 LED406.4 | length 23.9
  Component Side w0.203: LED405.2@-11.065,55.55 ccw(c-11.065,57.128) -9.487,57.128 -9.487,77.648 cw(c-8.935,77.648) LED406.4@-8.935,78.2
NetLED406_2: LED406.2 LED407.4 | length 45.1
  Component Side w0.203: LED407.4@-53.152,78.2 -52.784,78.2 ccw(c-52.784,78.661) -52.324,78.661 -52.324,79.121 cw(c-51.897,79.121) -51.897,79.548 -46.811,79.548 cw(c-46.81,79.345) -46.789,79.547 ccw(c-46.732,80.1) -46.732,79.544 -39.539,79.544 cw(c-39.615,79.356) -39.412,79.367 ccw(c-37.9,79.45) -39.297,78.865 ccw(c-37.9,79.45) -37.9,77.936 v1(-35.221,77.936) ; v1(-12.521,79.3) LED406.2@-11.065,79.3 LED406.2@-11.313,79.548
  Bottom Layer w0.203: v1(-35.221,77.936) cw(c-33.909,77.936) -33.909,79.248 -12.573,79.248 ccw(c-12.573,79.3) v1(-12.521,79.3)
NetLED407_2: LED407.2 LED408.4 | length 43.1
  Component Side w0.203: LED408.4@-97.368,78.2 -96.967,78.2 ccw(c-96.967,78.601) -96.566,78.601 -96.566,78.865 cw(c-95.902,78.865) -95.902,79.529 -55.511,79.529 LED407.2@-55.282,79.3
NetLED408_2: LED408.2 LED409.4 | length 43.1
  Component Side w0.203: LED409.4@-141.585,78.2 -141.116,78.2 ccw(c-141.116,78.532) -140.783,78.532 -140.783,78.865 cw(c-140.119,78.865) -140.119,79.529 -99.727,79.529 LED408.2@-99.498,79.3
NetLED409_2: LED409.2 LED410.4 | length 43.2
  Component Side w0.203: LED410.4@-185.802,78.2 -185.337,78.2 ccw(c-185.337,78.537) -185,78.537 -185,78.874 cw(c-184.326,78.874) -184.326,79.548 -143.715,79.548 LED409.2@-143.715,79.3
NetLED410_2: LED410.2 LED411.4 | length 43.1
  Component Side w0.203: LED411.4@-230.018,78.2 -229.515,78.2 ccw(c-229.515,78.537) -229.177,78.537 -229.177,78.874 cw(c-228.503,78.874) -228.503,79.548 -188.18,79.548 LED410.2@-187.932,79.3
NetLED411_2: LED411.2 LED412.4 | length 47.1
  Component Side w0.203: LED412.4@-274.449,79.815 -274.237,79.815 cw(c-274.237,79.375) -273.797,79.375 -273.797,78.43 ccw(c-270.705,78.43) -273.147,76.534 ccw(c-270.705,78.43) -272.495,75.909 ccw(c-270.705,78.43) -270.705,75.338 -261.443,75.338 ccw(c-261.443,78.43) -259.257,76.244 -259.097,76.404 -256.46,79.041 -256.336,79.165 cw(c-254.381,77.16) -255.797,79.576 cw(c-254.381,77.16) -252.964,79.576 ccw(c-252.863,79.752) -252.863,79.548 -232.748,79.548 cw(c-232.748,78.7) LED411.2@-232.148,79.3
NetLED412_2: LED412.2 LED413.4 | length 32.8
  Component Side w0.203: -279.698,61.611 cw(c-279.061,62.575) -280.217,62.575 -280.217,63.874 cw(c-278.228,63.874) -279.635,65.279 -278.502,66.412 -276.61,68.304 ccw(c-278.795,70.491) -275.951,69.279 ccw(c-278.795,70.491) -275.703,70.491 -275.703,71.391 ccw(c-275.906,71.392) -275.703,71.397 ; -279.697,61.611 cw(c-279.861,59.345) -277.6,59.132 cw(c-279.861,59.345) -278.512,57.518 ccw(c-278.391,57.354) -278.594,57.354 -278.594,55.842 ccw(c-278.391,55.843) -278.553,55.72 cw(c-280.361,54.345) -278.195,53.661 cw(c-280.361,54.345) -278.553,52.97 ccw(c-278.391,52.847) -278.594,52.847 -278.594,51.993 ccw(c-276.606,51.99) -278.43,51.199 ccw(c-276.606,51.99) -278.061,50.634 ccw(c-277.912,50.773) -277.973,50.579 ccw(c-277.781,51.199) -277.781,50.55 LED413.4@-276.063,50.55 ; -275.703,71.397 cw(c-273.627,71.445) -275.703,71.493 ccw(c-275.906,71.498) -275.703,71.494 ccw(c-275.906,71.498) -275.703,71.499 -275.703,77.53 cw(c-275.548,77.53) LED412.2@-275.548,77.685
NetLED413_2: LED413.2 LED414.4 | length 36.8
  Component Side w0.203: -276.87,41.683 cw(c-275.888,39.06) -276.554,41.78 ; LED414.4@-275.548,17.25 -275.874,17.25 cw(c-275.874,17.576) -276.2,17.576 -276.2,21.819 -276.2,28.956 -276.2,31.998 cw(c-275.997,31.998) -276.19,32.061 ccw(c-278.35,32.765) -276.19,33.469 cw(c-275.997,33.532) -276.2,33.532 -276.2,35.455 ccw(c-277.252,35.457) -276.878,36.44 cw(c-275.888,39.06) -276.554,41.78 ; LED413.2@-273.934,49.45 cw(c-274.489,49.45) -274.489,48.895 -274.966,48.895 ccw(c-274.966,48.349) -275.512,48.349 -275.512,44.45 -275.512,42.94 cw(c-276.688,42.94) -275.94,42.032 cw(c-276.608,42.844) -276.083,41.933 cw(c-276.608,42.844) -276.409,41.812 cw(c-276.608,42.844) -276.413,41.811 ccw(c-275.888,39.06) -276.552,41.781 ccw(c-275.888,39.06) -276.554,41.78
NetLED414_2: LED414.2 LED415.4 | length 44.5
  Component Side w0.203: LED414.2@-274.449,19.38 -274.228,19.38 cw(c-274.228,18.253) -273.943,19.343 cw(c-273.995,19.147) -273.8,19.205 ccw(c-271.118,20.01) -273.779,19.138 ccw(c-271.118,20.01) -273.704,18.936 ; -273.779,19.137 ccw(c-271.118,20.01) -273.44,18.445 ccw(c-271.118,20.01) -269.885,17.496 cw(c-269.795,17.313) -269.794,17.517 -248.566,17.517 cw(c-248.565,17.313) -248.475,17.496 ccw(c-247.242,20.01) -246.009,17.496 cw(c-245.919,17.313) -245.918,17.517 -233.68,17.517 ccw(c-233.68,18.152) -233.045,18.152 -233.045,18.508 cw(c-232.688,18.508) -232.688,18.865 LED415.4@-232.148,18.865